# Allegro board s1d13700.brd
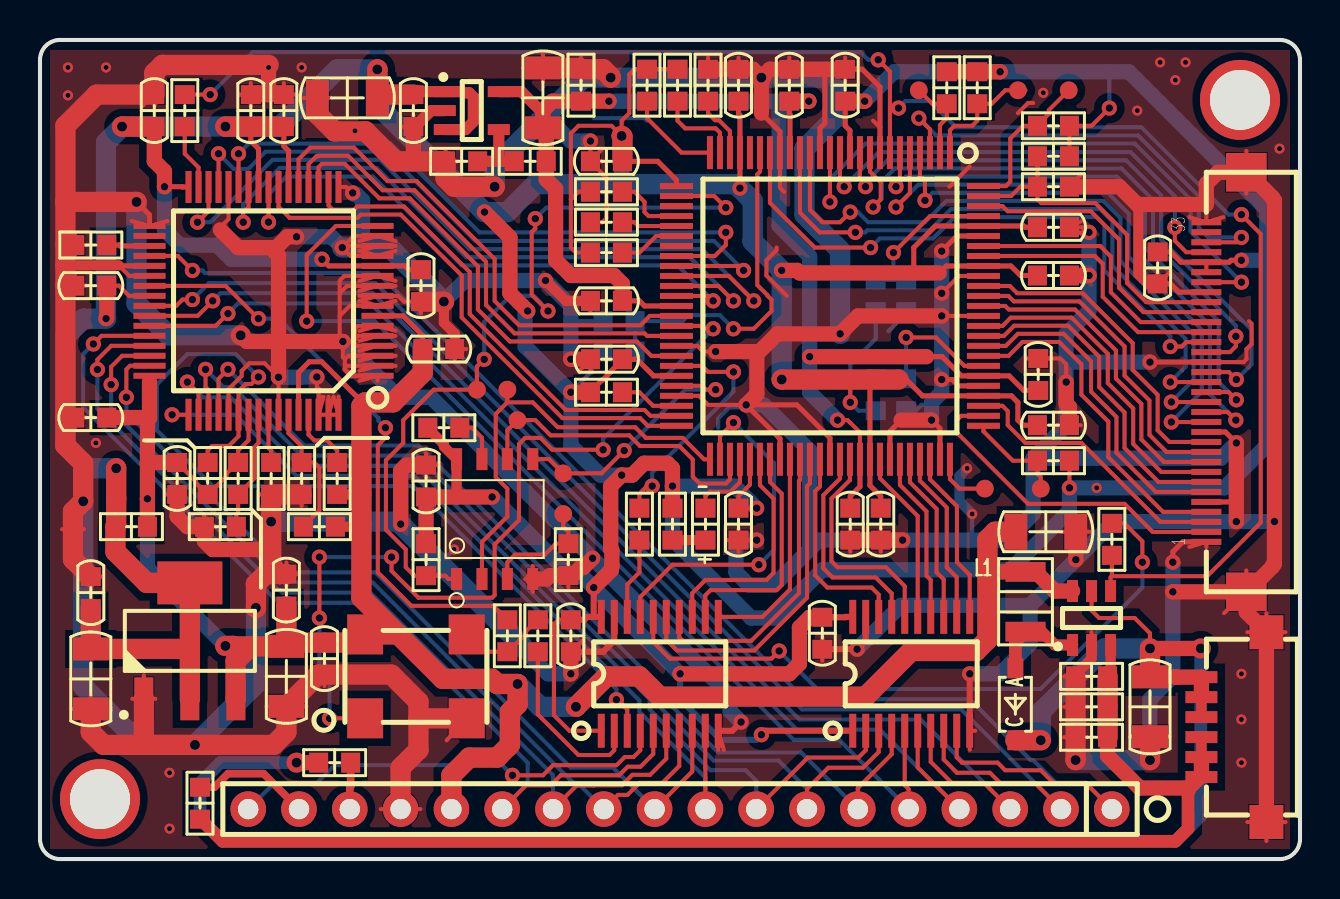
[diagram p0: board, top side]
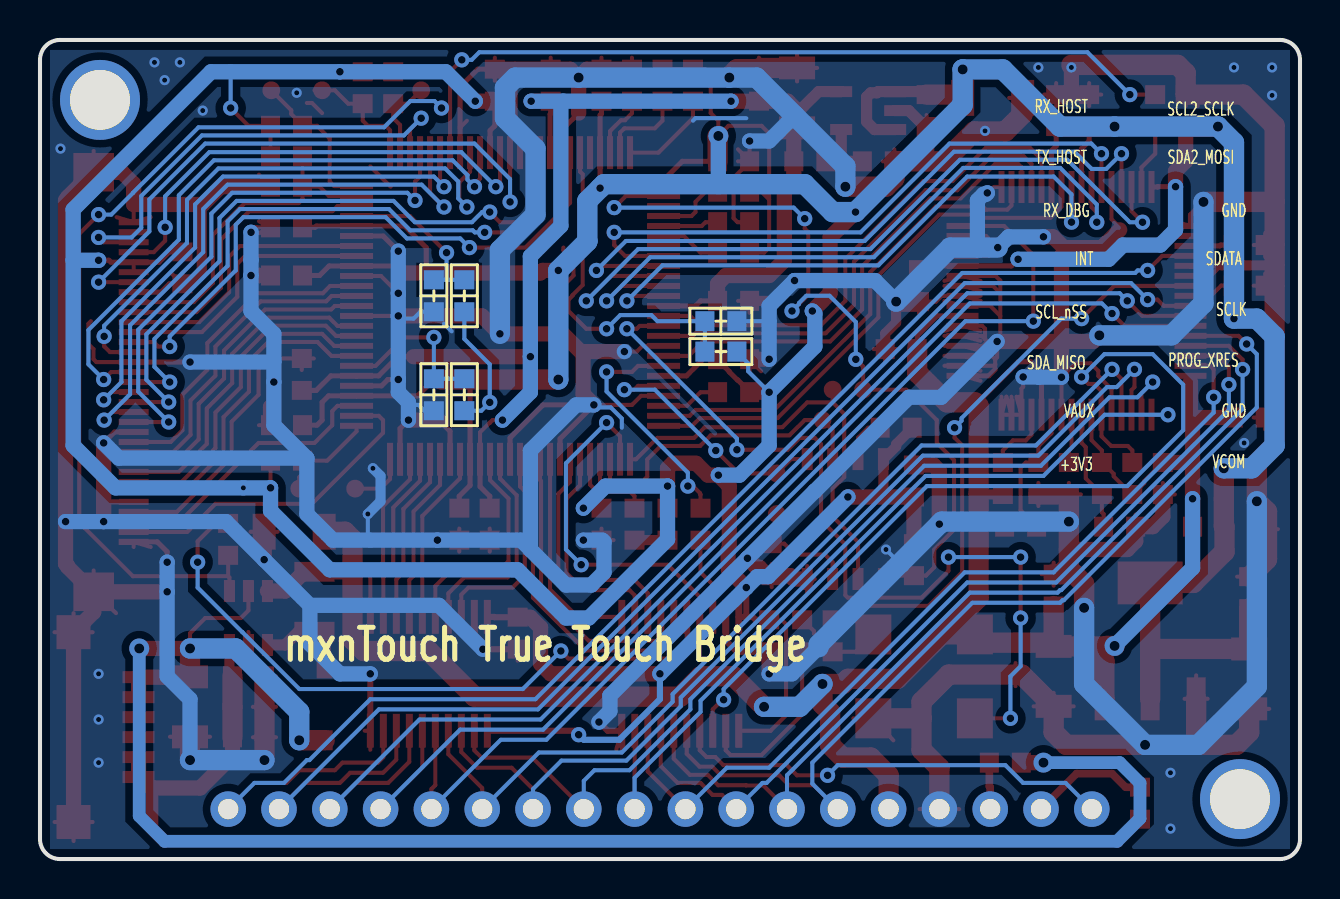
[diagram p1: board, bottom side, seen from below]

Outline 63 x 41 mm; copper layers: TOP, BOTTOM. Coordinates in mm from the lower left corner of the outline.
Outline path: 0,40 0,1 arc(0.29,0.29) 1,0 62,0 arc(62.71,0.29) 63,1 63,40 arc(62.71,40.71) 62,41 1,41 arc(0.29,40.71) 0,40

## Design rules (mm)
nets with their own width: min track width 0.203; nets +3V3

## Placement (name value [footprint] x y rotation side)
C1  0.1uF  [CC0603]  39.12 11.3 270 top
C2  0.1uF  [CC0603]  26.54 11.18 270 top
C3  10uF  [CC1206]  12.32 9.14 270 top
C4  0.1uF  [CC0603]  12.32 13.46 90 top
C5  10uF  [CC1206]  2.54 9.02 270 top
C6  0.1uF  [CC0603]  2.54 13.34 90 top
C7  0.1uF  [CC0603]  14.22 10.03 90 top
C8  10uF  [CC1206]  15.37 38.1 180 top
C9  0.1uF  [CC0603]  18.67 37.47 270 top
C10  10uF  [CC1206]  25.15 38.1 90 top
C11  0.1uF  [CR0603]  27.05 38.73 90 top
C12  0.1uF  [CC0603]  19.05 28.7 270 top
C13  0.1uF  [CC0603]  10.54 37.47 90 top
C14  0.1uF  [CC0603]  2.54 28.7 180 top
C15  0.1uF  [CC0603]  19.94 25.53 0 top
C16  0.1uF  [CC0603]  2.54 22.1 180 top
C17  0.1uF  [CC0603]  6.86 19.05 270 top
C18  0.1uF  [CC0603]  12.19 37.47 90 top
C19  0.1uF  [CC0603]  5.71 37.47 90 top
C20  0.1uF  [CC0603]  19.3 18.92 90 top
C21  0.1uF  [CC0603]  42.04 16.76 270 top
C22  0.1uF  [CC0603]  50.67 31.62 0 top
C23  0.1uF  [CC0603]  50.67 21.72 0 top
C24  0.1uF  [CC0603]  28.32 25.02 180 top
C25  0.1uF  [CC0603]  28.32 34.92 180 top
C26  0.1uF  [CC0603]  40.26 38.73 90 top
C27  0.1uF  [CC0603]  34.92 38.73 90 top
C28  0.1uF  [CC0603]  34.92 16.76 270 top
C29  0.1uF  [CC0603]  50.67 29.21 0 top
C30  0.1uF  [CC0603]  40.51 16.76 270 top
C31  0.1uF  [CC0603]  28.32 27.94 180 top
C32  0.1uF  [CC0603]  37.47 38.73 90 top
C33  0.1uF  [CC0603]  49.91 24.26 90 top
C34  0.1uF  [CC0603]  55.88 29.59 270 top
C36  4.7uF  [CC1206]  50.29 16.38 0 top
C37  4.7uF  [CC1206]  55.5 7.62 270 top
D1  LED_G  [LED0603]  33.27 16.76 90 top
D2  MBR0530T1G  [SOD123]  48.77 7.75 90 top
J1  CON18  [SIP18]  53.59 2.5 90 top
J3  TM057KDH01  [CON33]  59.82 23.88 90 top
J4  CON6  [CON6X1_P1_00]  60.07 6.6 270 top
L1  10uH  [CL1210]  49.28 12.88 270 top
NOREF  -  [unnamed]  60 38 0 top
NOREF#2  -  [#2]  542.75 -82.65 0 top
NOREF#3  -  [#2]  193.54 16.72 0 top
NOREF#4  -  [unnamed]  3 3 0 top
R1  10K  [CR0603]  8.38 19.05 90 top
R2  33  [CR0603]  29.97 16.76 90 top
R3  0  [CR0603]  4.57 16.64 180 top
R4  33  [CR0603]  24.89 11.18 270 top
R5  33  [CR0603]  23.37 11.18 90 top
R6  DNP  [CR0603]  24.51 34.92 180 top
R7  DNP  [CR0603]  21.08 34.92 180 top
R8  0  [CR0603]  9.91 19.05 90 top
R9  DNC  [CR0603]  9.02 16.64 180 top
R10  0  [CR0603]  11.56 19.05 270 top
R11  0  [CR0603]  13.08 19.05 270 top
R12  DNC  [CR0603]  13.97 16.64 0 top
R13  0  [CR0603]  14.86 19.05 90 top
R14  4.7K  [CR0603]  2.54 30.73 0 top
R15  0  [CR0603]  30.35 38.73 270 top
R16  0  [CR0603]  31.88 38.73 270 top
R17  0  [CR0603]  33.4 38.73 270 top
R18  0  [CR0603]  28.32 33.4 180 top
R19  0  [CR0603]  28.32 30.35 180 top
R20  0  [CR0603]  28.32 31.88 180 top
R21  DNC  [CR0603]  50.67 35.18 0 top
R22  10K  [CR0603]  50.67 33.66 180 top
R23  4.7K  [CR0603]  28.32 23.37 180 top
R24  4.7K  [CR0603]  41.78 23.24 270 bottom
R25  4.7K  [CR0603]  43.31 23.24 90 bottom
R26  4.7K  [CR0603]  41.78 28.19 270 bottom
R27  4.7K  [CR0603]  43.31 28.19 90 bottom
R28  4.7K  [CR0603]  50.67 36.7 180 top
R29  4.7K  [CR0603]  31.62 16.76 270 top
R30  4.7K  [CR0603]  28.96 25.4 180 bottom
R31  4.7K  [CR0603]  28.96 26.92 0 bottom
R32  4.7K  [CR0603]  45.34 38.61 270 top
R33  4.7K  [CR0603]  50.67 19.94 180 top
R34  4.7K  [CR0603]  46.86 38.61 270 top
R35  4.7K  [CR0603]  19.3 14.99 270 top
R36  4.7K  [CR0603]  20.19 21.59 0 top
R37  4.7K  [CR0603]  26.42 14.99 270 top
R38  1.1  [CR0603]  52.58 9.14 180 top
R39  1.1  [CR0603]  52.58 7.62 180 top
R40  1.1  [CR0603]  52.58 6.1 180 top
R41  DNC  [CR0603]  14.73 4.83 180 top
R42  DNC  [CR0603]  8 2.79 270 top
R43  DNC  [CR0603]  53.59 16 270 top
R45  DNC  [CR0603]  7.24 37.47 90 top
TP1  TP  [TP-035C]  47.24 18.54 0 top
TP2  TP  [TP-035C]  50.04 18.54 0 top
TP3  TP  [TP-035C]  48.9 38.48 0 top
TP4  TP  [TP-035C]  43.94 38.48 0 top
TP5  TP  [TP-035C]  23.88 21.97 0 top
TP6  TP  [TP-035C]  26.16 19.3 0 top
TP7  TP  [TP-035C]  23.37 23.5 0 top
TP8  TP  [TP-035C]  21.84 23.5 0 top
TP9  TP  [TP-035C]  26.16 17.27 0 top
TP10  TP  [TP-035C]  51.44 38.48 0 top
TP11  TP  [TP-035C]  3.81 18.03 0 top
TP12  TP  [TP-035C]  1.65 16.51 0 top
U1  SN74AC245  [TSSOP-20N]  28.06 6.42 0 top
U2  SN74AC245  [TSSOP-20N]  40.64 6.42 0 top
U3  LM1117-3.3V  [SOT223]  7.49 10.92 90 top
U4  SG8002  [SG8002JF]  18.8 9.14 0 top
U5  TLV70012  [SOT23-5]  21.59 37.47 270 top
U6  S1D13700  [TQFP-64N]  11.18 27.94 180 top
U7  XC3S50A-4VQG100C  [TQFP-100N]  39.5 27.69 270 top
U8  SST25VF010  [SOIC-8N]  20.83 14.02 90 top
U9  SP1072  [SOT23-6N]  52.58 12.06 0 top

## Library data of the parts
C1-C34 C36 C37 = CAP
D1 = LED
D2 = MBR0530T1G
J1 = CON18
J3 = TM057KDH01
J4 = CON6
L1 = INDUCTOR
R1-R43 R45 = RES1
TP1-TP12 = TP
U1 U2 = SN74AC245
U3 = LM1117-3.3V
U4 = SG8002
U5 = TLV70012
U6 = S1D13700
U7 = XC3S50A-4VQG100C
U8 = SST25VF010
U9 = SP1072

## Footprints (pads in the part's own frame, mm; a bottom-side part is the same pattern mirrored in y, then rotated)
CC0603
  rect 0.95x1 smd: 1(-0.8,0) 2(0.8,0)
CC1206
  rect 1.15x1.8 smd: 1(-1.5,0) 2(1.5,0)
CL1210
  rect 0.991x2.007 smd: 1(-1.499,0) 2(1.499,0)
CON6X1_P1_00
  rect 0.6x1.6 smd: 1(-2.5,-2) 2(-1.5,-2) 3(-0.5,-2) 4(0.5,-2) 5(1.5,-2) 6(2.5,-2)
  rect 1.7x1.7 smd: 7(-4.75,1.25) 8(4.75,1.25)
CON33
  rect 0.305x1.499 smd: 1(-8,1.5) 2(-7.5,1.5) 3(-7,1.5) 4(-6.5,1.5) 5(-6,1.5) 6(-5.5,1.5) 7(-5,1.5) 8(-4.5,1.5) 9(-4,1.5) 10(-3.5,1.5) 11(-3,1.5) 12(-2.5,1.5) 13(-2,1.5) 14(-1.5,1.5) 15(-1,1.5) 16(-0.5,1.5) 17(0,1.5) 18(0.5,1.5) 19(1,1.5) 20(1.5,1.5) 21(2,1.5) 22(2.5,1.5) 23(3,1.5) 24(3.5,1.5) 25(4,1.5) 26(4.5,1.5) 27(5,1.5) 28(5.5,1.5) 29(6,1.5) 30(6.5,1.5) 31(7,1.5) 32(7.5,1.5) 33(8,1.5)
  rect 1.93x2.032 smd: 34(-10.5,-0.5) 35(10.5,-0.5)
CR0603
  rect 0.95x1 smd: 1(-0.8,0) 2(0.8,0)
LED0603
  rect 0.95x1 smd: 1(-0.8,0) 2(0.8,0)
SG8002JF
  rect 1.8x2 smd: 1(-2.54,-2.1) 2(2.54,-2.1) 3(2.54,2.1) 4(-2.54,2.1)
SIP18
  round 1.778 hole 1.016: 1(0,0) 2(0,2.54) 3(0,5.08) 4(0,7.62) 5(0,10.16) 6(0,12.7) 7(0,15.24) 8(0,17.78) 9(0,20.32) 10(0,22.86) 11(0,25.4) 12(0,27.94) 13(0,30.48) 14(0,33.02) 15(0,35.56) 16(0,38.1) 17(0,40.64) 18(0,43.18)
SOD123
  rect 1x0.8 smd: 1(1.8,0) 2(-1.8,0)
SOIC-8N
  rect 1.1x0.55 smd: 1(0,0) 2(0,-1.27) 3(0,-2.54) 4(0,-3.81) 5(6,-3.81) 6(6,-2.54) 7(6,-1.27) 8(6,0)
SOT23-5
  rect 0.55x1.1 smd: 1(-0.95,-1.35) 2(0,-1.35) 3(0.95,-1.35) 4(0.95,1.35) 5(-0.95,1.35)
SOT23-6N
  rect 0.55x1.1 smd: 1(-0.95,-1.35) 2(0,-1.35) 3(0.95,-1.35) 4(0.95,1.35) 5(0,1.35) 6(-0.95,1.35)
SOT223
  rect 2.149x0.95 smd: 1(-2.901,2.301) 2(-2.901,0) 3(-2.901,-2.301)
  rect 2.149x3.251 smd: 4(2.901,0)
TP-035C
  round 0.889 smd: 1(0,0)
TQFP-64N
  rect 1.6x0.3 smd: 1(-5.7,3.75) 2(-5.7,3.25) 3(-5.7,2.75) 4(-5.7,2.25) 5(-5.7,1.75) 6(-5.7,1.25) 7(-5.7,0.75) 8(-5.7,0.25) 9(-5.7,-0.25) 10(-5.7,-0.75) 11(-5.7,-1.25) 12(-5.7,-1.75) 13(-5.7,-2.25) 14(-5.7,-2.75) 15(-5.7,-3.25) 16(-5.7,-3.75) 33(5.7,-3.75) 34(5.7,-3.25) 35(5.7,-2.75) 36(5.7,-2.25) 37(5.7,-1.75) 38(5.7,-1.25) 39(5.7,-0.75) 40(5.7,-0.25) 41(5.7,0.25) 42(5.7,0.75) 43(5.7,1.25) 44(5.7,1.75) 45(5.7,2.25) 46(5.7,2.75) 47(5.7,3.25) 48(5.7,3.75)
  rect 0.3x1.6 smd: 17(-3.75,-5.7) 18(-3.25,-5.7) 19(-2.75,-5.7) 20(-2.25,-5.7) 21(-1.75,-5.7) 22(-1.25,-5.7) 23(-0.75,-5.7) 24(-0.25,-5.7) 25(0.25,-5.7) 26(0.75,-5.7) 27(1.25,-5.7) 28(1.75,-5.7) 29(2.25,-5.7) 30(2.75,-5.7) 31(3.25,-5.7) 32(3.75,-5.7) 49(3.75,5.7) 50(3.25,5.7) 51(2.75,5.7) 52(2.25,5.7) 53(1.75,5.7) 54(1.25,5.7) 55(0.75,5.7) 56(0.25,5.7) 57(-0.25,5.7) 58(-0.75,5.7) 59(-1.25,5.7) 60(-1.75,5.7) 61(-2.25,5.7) 62(-2.75,5.7) 63(-3.25,5.7) 64(-3.75,5.7)
TQFP-100N
  rect 1.65x0.3 smd: 1(-7.675,6) 2(-7.675,5.5) 3(-7.675,5) 4(-7.675,4.5) 5(-7.675,4) 6(-7.675,3.5) 7(-7.675,3) 8(-7.675,2.5) 9(-7.675,2) 10(-7.675,1.5) 11(-7.675,1) 12(-7.675,0.5) 13(-7.675,0) 14(-7.675,-0.5) 15(-7.675,-1) 16(-7.675,-1.5) 17(-7.675,-2) 18(-7.675,-2.5) 19(-7.675,-3) 20(-7.675,-3.5) 21(-7.675,-4) 22(-7.675,-4.5) 23(-7.675,-5) 24(-7.675,-5.5) 25(-7.675,-6) 51(7.675,-6) 52(7.675,-5.5) 53(7.675,-5) 54(7.675,-4.5) 55(7.675,-4) 56(7.675,-3.5) 57(7.675,-3) 58(7.675,-2.5) 59(7.675,-2) 60(7.675,-1.5) 61(7.675,-1) 62(7.675,-0.5) 63(7.675,0) 64(7.675,0.5) 65(7.675,1) 66(7.675,1.5) 67(7.675,2) 68(7.675,2.5) 69(7.675,3) 70(7.675,3.5) 71(7.675,4) 72(7.675,4.5) 73(7.675,5) 74(7.675,5.5) 75(7.675,6)
  rect 0.3x1.65 smd: 26(-6,-7.675) 27(-5.5,-7.675) 28(-5,-7.675) 29(-4.5,-7.675) 30(-4,-7.675) 31(-3.5,-7.675) 32(-3,-7.675) 33(-2.5,-7.675) 34(-2,-7.675) 35(-1.5,-7.675) 36(-1,-7.675) 37(-0.5,-7.675) 38(0,-7.675) 39(0.5,-7.675) 40(1,-7.675) 41(1.5,-7.675) 42(2,-7.675) 43(2.5,-7.675) 44(3,-7.675) 45(3.5,-7.675) 46(4,-7.675) 47(4.5,-7.675) 48(5,-7.675) 49(5.5,-7.675) 50(6,-7.675) 76(6,7.675) 77(5.5,7.675) 78(5,7.675) 79(4.5,7.675) 80(4,7.675) 81(3.5,7.675) 82(3,7.675) 83(2.5,7.675) 84(2,7.675) 85(1.5,7.675) 86(1,7.675) 87(0.5,7.675) 88(0,7.675) 89(-0.5,7.675) 90(-1,7.675) 91(-1.5,7.675) 92(-2,7.675) 93(-2.5,7.675) 94(-3,7.675) 95(-3.5,7.675) 96(-4,7.675) 97(-4.5,7.675) 98(-5,7.675) 99(-5.5,7.675) 100(-6,7.675)
TSSOP-20N
  rect 0.35x1.7 smd: 1(0,0) 2(0.65,0) 3(1.3,0) 4(1.95,0) 5(2.6,0) 6(3.25,0) 7(3.9,0) 8(4.55,0) 9(5.2,0) 10(5.85,0) 11(5.85,5.7) 12(5.2,5.7) 13(4.55,5.7) 14(3.9,5.7) 15(3.25,5.7) 16(2.6,5.7) 17(1.95,5.7) 18(1.3,5.7) 19(0.65,5.7) 20(0,5.7)
unnamed
  round 4 hole 3: (0,0)

## Nets
+1V2: C10.1 C11.1 C30.1 C31.1 C32.1 C33.1 R6.1 U5.5(OUT) U7.17(VCCINT#17) U7.38(VCCINT#38) U7.66(VCCINT#66) U7.81(VCCINT#81)
+3V3: C1.1 C2.1 C5.1 C6.1 C8.1 C9.1 C12.1 C13.1 C14.1 C18.1 C19.1 C20.1 C21.1 C22.1 C23.1 C24.1 C25.1 C26.1 C27.1 C28.1 C29.1 C34.1 J3.28(VCC1) J3.29(VCC2) R3.2 R15.1 R16.1 R18.2 R19.2 R21.2 R23.2 R24.2 R26.2 R28.1 R29.1 R30.2 R32.1 R33.1 R34.1 R35.1 R36.1 TP11.1(TP) U1.1(DIR) U1.20(VCC) U2.1(DIR) U2.20(VCC) U3.2(VOUT1) U3.4(VOUT2) U5.1(IN) U5.3(EN) U6.12(COREVDD1) U6.22(NIOVDD1) U6.25(COREVDD2) U6.32(NIOVDD2) U6.40(COREVDD3) U7.11(VCCO_3) U7.22(VCCAUX#22) U7.26(VCCO_2#26) U7.45(VCCO_2#45) U7.55(VCCAUX#55) U7.67(VCCO_1) U7.79(VCCO_0#79) U7.92(VCCAUX#92) U7.96(VCCO_0#96) U8.8(VDD)
+5V0: C3.1 C4.1 C7.2 C15.1 C16.1 C17.1 C36.1 J1.14 L1.1 R1.1 R3.1 R8.2 R12.2 R13.1 U3.3(VIN) U4.4(VCC) U6.7(HIOVDD1) U6.48(HIOVDD2) U6.55(HIOVDD3) U6.60(CNF4) U9.6(IN)
GND: C1.2 C2.2 C3.2 C4.2 C5.2 C6.2 C7.1 C8.2 C9.2 C10.2 C11.2 C12.2 C13.2 C14.2 C15.2 C16.2 C17.2 C18.2 C19.2 C20.2 C21.2 C22.2 C23.2 C24.2 C25.2 C26.2 C27.2 C28.2 C29.2 C30.2 C31.2 C32.2 C33.2 C34.2 C36.2 C37.2 J1.15 J3.1(GND1) J3.5(GND2) J3.12(GND3) J3.19(GND4) J3.26(GND5) J3.33(GND6) J3.34(GND7) J3.35(GND8) J4.7 J4.8 R7.2 R9.2 R10.2 R11.2 R14.1 R17.1 R20.2 R22.1 R25.1 R27.1 R31.1 R37.2 R38.2 R39.2 R40.2 TP12.1(TP) U1.10(GND) U1.19(#OE) U2.10(GND) U2.19(#OE) U3.1(GND) U4.2(GND) U5.2(GND) U6.1(VSS1) U6.2(A12) U6.3(A11) U6.4(A10) U6.5(A9) U6.6(A8) U6.8(A7) U6.9(A6) U6.10(A5) U6.11(A4) U6.13(A3) U6.14(A2) U6.15(A1) U6.17(VSS2) U6.28(VSS3) U6.33(VSS4) U6.37(SCANEN) U6.38(TESTEN) U6.53(VSS5) U6.58(CNF2) U6.62(A15) U6.63(A14) U6.64(A13) U7.8(GND#8) U7.14(GND#14) U7.18(GND#18) U7.42(GND#42) U7.47(GND#47) U7.58(GND#58) U7.63(GND#63) U7.69(GND#69) U7.74(GND#74) U7.80(GND#80) U7.87(GND#87) U7.91(GND#91) U7.95(GND#95) U8.4(VSS) U9.2(GND)
#CS: J1.4 U2.6(A5) U6.43(#CS)
#FCS: U2.14(B5) U7.70(IO_L05P_1)
#FRD: U2.12(B7) U7.72(IO_L06P_1)
#FWAIT: U1.17(B2) U7.52(IO_L12P_2/D1)
#FWR: U2.13(B6) U7.71(IO_L05N_1)
#FXRES: U2.11(B8) U7.73(IO_L06N_1)
#RD: J1.2 U2.8(A7) U6.41(#RD)
#SPI_CS: R35.2 TP8.1(TP) U7.27(IO_L02N_2/CSO_B) U8.1(#CE)
#SPI_WP: R37.1 TP9.1(TP) U8.3(#WP)
#WAIT: R1.2 U1.3(A2) U6.54(#WAIT)
#WR: J1.3 U2.7(A6) U6.42(#WR)
#XRES: J1.1 U2.9(A8) U6.36(#RESET)
A0: J1.5 U2.5(A4) U6.16(A0)
B0: J3.20(B0) U7.9(IO_L03P_3/LHCLK0)
B1: J3.21(B1) U7.19(IO_L06P_3)
B2: J3.22(B2) U7.93(IO_L05P_0)
B3: J3.23(B3) U7.94(IO_L05N_0)
B4: J3.24(B4) U7.98(IO_L06P_0/VREF_0)
B5: J3.25(B5) R21.1 R22.2 U7.99(IO_L06N_0/PUDC_B)
CLK: R5.2 U6.39(CLKI)
COLOR_S0: R24.1 R25.2 U7.82(IP_0/VREF_0)
COLOR_S1: R26.1 R27.2 U7.97(IP_0)
COLOR_S2: R30.1 R31.2 U7.20(IO_L06N_3)
COLOR_S3: U7.32(IO_L05P_2)
COLOR_S4: U7.21(IP_3)
COLOR_S5: U7.28(IO_L03P_2/RDWR_B)
D0: J1.6 U2.4(A3) U6.52(D0)
D1: J1.7 U2.3(A2) U6.51(D1)
D2: J1.8 U2.2(A1) U6.50(D2)
D3: J1.9 U1.9(A8) U6.49(D3)
D4: J1.10 U1.8(A7) U6.47(D4)
D5: J1.11 U1.7(A6) U6.46(D5)
D6: J1.12 U1.6(A5) U6.45(D6)
D7: J1.13 U1.5(A4) U6.44(D7)
DCLK: J3.2(DOTCLK) U7.77(IO_L01P_0/VREF_0)
DONE: D1.2(K) U7.54(DONE)
ENABLE: J3.27(ENABLE) U7.13(IO_L04N_3/IRDY2/LHCLK3)
FA0: U2.15(B4) U7.68(IP_1/VREF_1)
FCLK: R2.2 U7.44(IO_L09N_2/GCLK1)
FD0: U2.16(B3) U7.65(IO_L04N_1/RHCLK7)
FD1: U2.17(B2) U7.64(IO_L04P_1/IRDY1/RHCLK6)
FD2: U2.18(B1) U7.62(IO_L03N_1/TRDY1/RHCLK3)
FD3: U1.11(B8) U7.59(IO_L02P_1/RHCLK0)
FD4: U1.12(B7) U7.57(IO_L01N_1)
FD5: U1.13(B6) U7.56(IO_L01P_1)
FD6: U1.14(B5) U7.60(IO_L02N_1/RHCLK1)
FD7: U1.15(B4) U7.61(IO_L03P_1/RHCLK2)
FPDAT0: U6.21(FPDAT0) U7.39(IP_2/VREF_2)
FPDAT1: U6.20(FPDAT1) U7.41(IO_L08N_2/GCLK15)
FPDAT2: U6.19(FPDAT2) U7.43(IO_L09P_2/GCLK0)
FPDAT3: U6.18(FPDAT3) U7.49(IO_L10N_2/D3)
FPFRAME: U6.30(FPFRAME) U7.35(IO_L06N_2/D6)
FPLINE: U6.26(FPLINE) U7.36(IO_L07P_2/D5)
FPSHIFT: U6.23(FPSHIFT) U7.50(IO_L11P_2/D2)
G0: J3.13(G0) U7.4(IO_L01N_3)
G1: J3.14(G1) U7.5(IO_L02P_3)
G2: J3.15(G2) U7.15(IO_L05P_3/TRDY2/LHCLK6)
G3: J3.16(G3) U7.6(IO_L02N_3)
G4: J3.17(G4) U7.16(IO_L05N_3/LHCLK7)
G5: J3.18(G5) U7.10(IO_L03N_3/LHCLK1)
HSYNC: J3.3(HSYNC) U7.78(IO_L01N_0)
LEDA: C37.1 D2.2(CATHODE) J4.1 J4.2 J4.3 R41.2 U9.5(OV)
LEDK: J4.4 J4.5 J4.6 R38.1 R39.1 R40.1 R42.2 U9.3(FB)
M0: R15.2 U7.25(IO_L01N_2/M0)
M1: R17.2 U7.23(IO_L01P_2/M1)
M2: R16.2 U7.24(IO_L02P_2/M2)
MOD: U6.27(MOD) U7.33(IO_L06P_2)
PROG_B: R28.2 TP10.1(TP) U7.100(PROG_B)
R0: J3.6(R0) U7.84(IO_L02N_0/GCLK5)
R1: J3.7(R1) U7.85(IO_L03P_0/GCLK6)
R2: J3.8(R2) U7.86(IO_L03N_0/GCLK7)
R3: J3.9(R3) U7.88(IO_L04P_0/GCLK8)
R4: J3.10(R4) U7.89(IO_L04N_0/GCLK9)
R5: J3.11(R5) U7.90(IO_0/GCLK11)
RL: J3.30(R/L) U7.12(IO_L04P_3/LHCLK2)
SLP: J1.18 U1.4(A3)
SPI_CLK: TP5.1(TP) U7.53(IO_L12N_2/CCLK) U8.6(SCK)
SPI_MISO: TP7.1(TP) U7.51(IO_L11N_2/D0/DIN/MISO) U8.2(SO)
SPI_MOSI: TP6.1(TP) U7.46(IO_2/MOSI/CSI_B) U8.5(SI)
STANDBY: U4.1(OE/#ST) U7.40(IO_L08P_2/GCLK14)
TCK: R33.2 TP2.1(TP) U7.76(TCK)
TDI: R32.2 TP4.1(TP) U7.2(TDI)
TDO: TP1.1(TP) U7.75(TDO)
TMS: R34.2 TP3.1(TP) U7.1(TMS)
UD: J3.31(U/D) U7.3(IO_L01P_3)
VS0: R19.1 U7.31(IO_L04N_2/VS0)
VS1: R20.1 U7.30(IO_L03N_2/VS1)
VS2: R18.1 U7.29(IO_L04P_2/VS2)
VSYNC: J3.4(VSYNC) U7.83(IO_L02P_0/GCLK4)
XECL: U6.24(XECL) U7.37(IO_L07N_2/D4)
YDIS: R43.2 R45.2 U7.7(IP_3/VREF_3) U9.4(EN)
YSCL: U6.29(YSCL) U7.34(IO_L05N_2/D7)
N1268731: R45.1 U6.31(YDIS)
N1269622: R13.2 U6.61(#AS)
N1269731: R14.2 U6.35(XCG1)
N1279949: R6.2 R7.1 U5.4(NC)
N1292260: J1.16 R41.1
N1295201: R4.1 R5.1 U4.3(OUT)
N1295205: R4.2 U1.2(A1)
N1302115: R11.1 R12.1 U6.59(CNF3)
N1302518: R10.1 U6.57(CNF1)
N1302632: R8.1 R9.1 U6.56(CNF0)
N1385205: R23.1 U7.48(IO_L10P_2/INIT_B)
N1393291: D1.1(A) R29.2
N1408610: R36.2 U8.7(#HOLD)
N1457773: D2.1(ANODE) L1.2 U9.1(SW)
N1465328: J1.17 R42.1
N1502699: R2.1 U1.18(B1)
N1509290: R43.1 U1.16(B3)

Pads without a net: J3 32; U6 34

## Via types
v1: diameter 0.762, hole 0.381, TOP to BOTTOM, 136 vias
v2: diameter 1, hole 0.5, TOP to BOTTOM, 25 vias
v3: diameter 0.508, hole 0.254, TOP to BOTTOM, 22 vias

## Routing (per net, layer and track width the routed paths; a pad name or vN(x,y) marks a point on that pad's centre or on a via; arc(x,y) is an arc through that point)
+1V2: length 69.7
  TOP w0.203: v1(39.88,21.97) 40.37,21.97 40.5,21.84 40.51,21.84 41,21.36 U7.66
  TOP w0.254: C30.1 40.51,18.16 41,18.64 U7.66 ; C33.1 49.19,23.46 48.46,24.19 U7.81 46.07,24.19 45.11,25.15 44.32,25.15 ; U7.38 30.23,27.69 29.97,27.94 C31.1 ; C32.1 37.47,37.31 37.5,37.28 U7.17
  TOP w0.559: U5.5 24.07,38.42 25.15,37.34
  TOP w0.762: C32.1 v1(38.44,37.93) ; v1(38.48,25.15) 44.32,25.15 ; v1(28.45,37.93) C11.1 25.62,37.93 25.15,37.47 C10.1 25.31,36.43 R6.1 25.31,34.02 25.78,33.55 25.78,29.97 26.54,29.21 28.7,29.21 29.12,28.79 C31.1
  BOTTOM w0.762: v1(39.88,21.97) 38.48,23.37 v1(38.48,25.15) 38.48,30.17 36.96,31.69 36.96,37.81 36.83,37.93 ; 36.83,37.93 v1(28.45,37.93) ; 36.83,37.93 v1(38.44,37.93)
+3V3: length 405.7
  TOP w0.203: 26.54,33.02 26.54,36.32 26.92,36.7 28.57,36.7 v2(29.08,36.2) 29.08,36.96 29.46,37.34 29.46,39.27 29.73,39.54 R15.1 R16.1 ; 26.54,33.02 26.54,30.61 26.8,30.35 R19.2 ; 26.54,33.02 26.92,33.4 R18.2 ; U1.1 26.47,6.42 25.7,7.2 25.7,11.76 25.92,11.98 C2.1 ; U6.40 4.45,28.19 3.94,28.7 C14.1 ; J3.28 J3.29 ; U7.55 35.5,18.74 34.92,18.17 C28.1 v1(35.83,17.56) ; R21.2 R28.1 52.58,36.7 v1(53.47,37.59) ; R33.1 v1(51.47,18.58) ; v1(40.51,22.86) 40.51,24
  TOP w0.254: U7.26 31.82,33.99 30.89,34.92 C25.1 ; 41.53,24 41.5,23.97 U7.67 41.5,18.7 42.04,18.16 C21.1 ; 44.96,29.34 45.31,29.69 U7.92 48.55,29.69 49.02,29.21 C29.1 ; U6.22 12.43,35.45 12.19,35.69 C18.1 ; C26.1 40.26,36.7 40.5,36.47 U7.11 ; C27.1 34.92,37.31 35,37.24 U7.22 v1(35,33.58) ; 42.93,24 43.31,24 44.12,23.19 U7.79 48.57,23.19 48.9,22.86 48.9,21.97 49.15,21.72 C23.1 ; C34.1 56.53,30.39 57.05,29.88 J3.29 59.45,29.88 59.55,29.97 v1(60.07,29.97) ; v1(14.1,30.02) 14.43,29.69 U6.12 18.24,29.69 18.42,29.5 C12.1 ; 43.69,29.34 43.69,30.61 44.77,31.69 U7.96 49.18,31.69 49.25,31.62 C22.1 ; C13.1 10.54,35.94 10.93,35.56 U6.25 ; v1(6.22,33.66) 7.11,33.66 7.12,33.64 U6.32 ; R23.2 27.52,23.39 28.1,23.98 28.13,23.98 28.54,24.39 28.54,24.41 29.12,24.99 C24.1 29.84,25.02 30.68,24.19 U7.45
  TOP w0.305: 27.69,12.12 27.37,12.12 27.22,11.98 C2.1 ; 27.69,12.12 U1.20 ; 27.69,12.12 v1(27.69,13.59) ; U2.20 40.28,12.12 40.27,12.1 C1.1 ; v1(36.07,6.22) 36.27,6.42 U2.1
  TOP w0.508: 20.83,18.12 U8.8 20.19,20.65 20.19,20.76 19.39,21.57 R36.1
  TOP w0.559: U5.3 21.27,36.51 21.67,36.91 21.67,38.15 21.46,38.35 21.16,38.35 21.09,38.42 U5.1 18.82,38.42 C9.1
  TOP w0.762: v1(32,9.27) 37.47,9.27 37.97,9.78 37.97,11.59 38.49,12.1 C1.1 ; R29.1 v1(31.62,18.67) 31.62,19.56 31.37,19.81 30.2,19.81 29.6,19.22 v1(29.08,19.22) 28.54,18.67 28.54,15.51 28.59,15.46 28.59,14.66 28.57,14.64 28.57,14.48 v1(27.69,13.59) ; v1(24.38,27.43) 23.5,28.32 23.5,31.11 v1(22.23,32.38) ; R35.1 C20.1 v1(22.61,18.12) ; R23.2 v1(26.54,23.37) ; C14.1 3.34,27.09 v1(3.3,27.05) ; v1(48.01,39.41) R34.1 R32.1 ; 44.96,29.34 37.99,29.34 37.86,29.46 v1(37.08,29.46) ; v1(41.24,37.93) C26.1 ; C19.1 5.71,34.94 6.22,34.43 v1(6.22,33.66)
  TOP w1.016: v2(3.81,19.56) TP11.1 3.81,16.68 R3.2 3.77,15.38 5.33,13.82 U3.4 7.49,10.54 ; 7.49,10.54 7.47,10.52 C5.1 C6.1 ; 7.49,10.54 U3.2 ; v2(37.08,24) 42.93,24 ; C18.1 C13.1 v2(9.27,36.66) ; C19.1 v2(4.1,36.66) ; C25.1 29.12,36.16 v2(29.08,36.2) ; C9.1 17.03,38.27 C8.1 v2(16.87,39.53)
  BOTTOM w0.203: R26.2 41.78,26.04 40.51,24.77 v1(40.51,22.86) 40.93,22.44 R24.2 ; R30.2 28.16,25.38 27.59,24.81 27.59,24.42 v1(26.54,23.37) ; v1(53.47,37.59) 53.47,39.41
  BOTTOM w0.305: v1(36.07,6.22) 35.81,5.97 34.04,5.97 32,8 v1(32,9.27)
  BOTTOM w0.762: v1(22.61,18.12) 26.59,14.14 27.14,14.14 v1(27.69,13.59) v1(32,9.27) ; v1(24.38,27.43) 24.26,27.3 24.26,25.65 v1(26.54,23.37) 26.54,20.7 28.03,19.22 v1(29.08,19.22) ; v1(6.22,33.66) 6.22,31.5 6.99,30.73 8.85,30.73 9.56,30.02 v1(14.1,30.02) ; v1(41.24,37.93) 42.71,39.41 v1(48.01,39.41) 54.44,39.41 61.34,32.51 61.34,29.97 ; v1(60.07,29.97) 61.34,29.97 ; 61.34,29.97 61.34,20.7 59.22,18.58 v3(52.83,18.58) v1(51.47,18.58) 51.47,17.44 48.51,14.48 39.12,14.48 36.7,12.06 35.56,12.06 31.62,16 v1(31.62,18.67) 34.73,18.67 v1(35.83,17.56) ; v2(29.08,36.2) 29.08,33.78
  BOTTOM w1.016: v2(37.08,24) v1(37.08,29.46) 35.64,30.91 35.64,30.95 35.63,30.95 35.63,32.95 v1(35,33.58) 34.8,33.78 24.77,33.78 23.37,32.38 v1(22.23,32.38) 16.87,37.74 v2(16.87,39.53) 14.86,39.53 12,36.66 v2(9.27,36.66) v2(4.1,36.66) 3.3,35.86 v1(3.3,27.05) 2.16,27.05 1.27,26.16 1.27,20.7 2.41,19.56 v2(3.81,19.56)
+5V0: length 123.6
  TOP w0.203: 5.48,23.89 U6.48 ; C17.1 7.79,18.92 7.79,18.81 8.36,18.25 R1.1 8.41,18.25 9.32,19.16 9.32,19.29 9.88,19.85 R8.2 9.91,20.45 10.43,20.97 U6.55
  TOP w0.254: U6.60 12.93,24.36 13.46,24.89 14.09,24.89 16.12,22.86 16.26,22.86 ; U6.7 18.15,27.19 19.14,26.2 C15.1
  TOP w0.508: R13.1 16.03,18.25 16.07,18.29 ; 16.07,16.76 15.94,16.64 R12.2
  TOP w0.762: 5.48,22.1 5.37,21.99 5.37,19.81 ; 5.48,22.1 C16.1 ; 5.48,22.1 5.48,23.89 ; U9.6 50.75,13.42 49.78,14.38 L1.1 47.37,14.38 ; 5.37,19.81 5.41,19.85 C17.1 ; 5.37,19.81 v1(5.37,18.03) R3.1
  TOP w1.016: C36.1 47.75,16.38 47.37,16 47.37,10.98 46.81,10.41 43.56,10.41 41.27,8.13 30.99,8.13 29.97,9.14 28.32,9.14 v2(26.8,7.62) ; U3.3 9.78,8.04 9.78,9.91 10.52,10.64 ; 17.91,11.24 20.13,9.02 22.6,9.02 22.86,8.76 v2(23.88,8.76) 23.88,7.74 23.5,7.36 23.5,5.71 22.86,5.08 21.46,5.08 20.57,4.19 J1.14 ; 17.91,11.24 16.07,13.08 16.07,22.67 16.26,22.86 17.65,22.86 19.14,24.35 C15.1 ; 17.91,11.24 U4.4 15.85,10.83 C7.2 12.51,10.83 C3.1 ; C3.1 10.52,10.64 ; C3.1 C4.1 ; 10.52,10.64 9.68,10.64 9.65,10.67 v2(9.27,10.67)
  BOTTOM w0.762: v1(5.37,18.03) 5.37,14.57 v2(9.27,10.67)
  BOTTOM w1.016: v2(23.88,8.76) 25.02,7.62 v2(26.8,7.62)
GND: length 767.2
  TOP w0.203: 15.75,26.02 15.92,26.19 U6.5 ; 15.75,26.02 15.75,26.54 15.89,26.69 U6.6 ; 15.75,26.02 15.64,25.91 ; C6.2 3.14,14.14 ; C6.2 2.54,13.56 ; C6.2 2.54,14.71 ; 22.34,7.04 U4.2 20.33,5.94 ; 39.12,9.93 C1.2 39.12,11.08 ; 20.74,24.93 C15.2 ; C15.2 20.16,25.53 ; C15.2 21.32,25.53 ; 52.35,7.62 R39.2 51.2,7.62 ; v1(52.45,31.37) 52.2,31.62 C22.2 ; U6.62 13.93,23.55 13.84,23.63 v1(13.84,24.13) ; U6.62 14.05,23.14 ; U6.62 14.18,23.14 ; U6.62 U6.63 ; 34.32,15.96 C28.2 ; C28.2 34.92,16.54 ; C28.2 34.92,15.39 ; C28.2 v1(35.83,15.96) ; U6.4 15.86,25.69 15.64,25.91 ; U6.4 17.78,25.69 ; U6.4 15.97,25.44 ; 15.97,30.44 U6.14 ; U6.14 17.78,30.69 ; U6.14 15.2,30.69 ; 42.04,15.39 C21.2 42.04,16.54 ; 8.22,17.24 R9.2 8.79,16.64 ; 34.92,38.96 C27.2 34.92,40.11 ; U3.1 5.77,8.02 ; U3.1 4.62,8.02 ; U3.1 5.19,9.2 ; C18.2 12.19,38.84 ; C18.2 12.79,38.27 ; C18.2 12.19,37.69 ; C25.2 27.52,34.9 28.32,34.1 28.32,32.08 28.12,31.88 R20.2 ; C25.2 28.1,34.92 ; C25.2 v1(27.52,35.94) ; C25.2 28.1,35.53 ; 54.5,6.12 C37.2 ; C37.2 56.5,6.12 ; C37.2 55.5,6.8 ; 15.97,28.94 U6.11 ; U6.11 17.78,28.94 ; U6.11 15.22,29.19 14.99,28.96 14.99,28.32 ; 1.27,28.7 C14.2 ; C14.2 2.32,28.7 ; C14.2 1.74,29.3 ; J3.33 59.17,32.13 ; J3.33 57.47,32.13 ; J3.33 58.32,32.77 ; 14.99,27.19 14.99,26.07 v1(15.14,25.91) ; 14.99,27.19 15.49,27.69 U6.8 ; 14.99,27.19 14.99,28.32 ; 52.05,34.26 R22.1 52.05,33.96 ; 49.91,24.48 C33.2 ; C33.2 49.31,25.06 ; C33.2 51.02,25.06 51.31,24.77 v1(51.31,23.88) ; 13.87,37.97 C8.2 ; C8.2 14.54,38.1 ; C8.2 13.87,39.1 ; C8.2 13.19,38.1 ; U6.8 17.78,27.94 ; U6.8 15.97,27.94 ; U6.64 14.93,23.14 ; U6.64 U6.63 ; U6.64 14.67,23.14 ; U6.6 15.97,26.44 ; U6.6 17.78,26.44 ; U6.3 17.78,25.19 ; U6.3 15.97,24.94 ; U6.3 15.41,25.19 15.24,25.02 ; 46.49,5.47 U2.10 46.76,6.42 ; 19.3,19.15 C20.2 ; C20.2 19.91,19.72 ; C20.2 19.3,20.3 ; 27.52,24.42 C24.2 26.94,24.42 ; 34.19,5.47 U1.10 33.91,5.47 ; 15.2,30.69 15.7,31.19 U6.15 ; 15.2,30.69 v1(15.11,30.61) 15.53,30.19 U6.13 ; 27.05,38.96 C11.2 ; C11.2 27.05,40.11 ; C11.2 26.45,39.54 ; C16.2 2.32,22.1 ; C16.2 1.27,22.1 ; C16.2 1.74,21.5 ; 15.97,27.94 U6.9 ; U6.9 15.97,28.19 ; U6.9 17.91,28.19 18.2,27.9 C12.2 ; 52.39,10.06 U9.2 52.58,11.37 ; 37.21,33.4 37,33.61 U7.18 ; 15.64,25.91 v1(15.14,25.91) ; 5.71,37.69 C19.2 5.11,37.69 ; U6.2 15.32,24.69 15.24,24.77 ; U6.2 17.78,24.69 ; U6.2 15.97,24.44 ; U6.63 14.43,23.14 ; U6.63 14.68,23.14 ; U6.13 17.78,30.44 ; U6.13 15.97,30.44 ; 52.35,9.14 R38.2 51.2,9.14 ; v1(45.09,28.32) 45.95,29.19 U7.91 ; 60.32,33.31 J3.35 60.32,35.44 ; 24.64,13.37 U8.4 ; U8.4 24.64,14.67 ; U8.4 24.26,14.02 ; 14.99,28.32 15.36,28.69 U6.10 ; 15.24,24.77 15.24,24.51 ; 15.24,24.77 15.24,25.02 ; 6.38,31.94 U6.33 4.57,31.94 ; 14.22,9.81 C7.1 14.22,8.66 ; 52.05,21.72 C23.2 50.9,21.72 ; U6.15 17.78,30.94 ; U6.15 15.97,30.94 ; 2.2,16.51 TP12.1 1.1,16.51 ; C5.2 2.54,8.19 ; C5.2 1.54,7.52 ; C5.2 3.54,7.52 ; 16.88,23.94 U6.1 15.97,23.94 ; 15.97,28.44 U6.10 ; U6.10 17.78,28.69 ; J3.19 60.18,24.88 60.33,25.02 60.33,25.53 60.58,25.78 60.58,26.8 60.45,26.92 ; 60.37,11.35 J4.7 ; J4.7 62.27,11.35 ; J4.7 61.32,12.31 ; 40.26,38.96 C26.2 40.26,40.11 ; 20.28,35.53 R7.2 20.86,34.92 ; 57.47,15.62 J3.1 58.32,15.62 ; 15.24,25.02 15.14,25.11 v1(15.14,25.91) ; 33.4,38.96 R17.1 33.4,40.11 ; U6.5 17.78,26.19 ; U6.5 15.97,25.94 ; C10.2 25.15,40.28 ; C10.2 25.15,38.92 ; C10.2 24.14,39.6 ; v1(33.78,25.4) 33.16,25.4 32.87,25.69 U7.42 ; R14.1 1.3,30.73 1.27,30.77 ; R14.1 1.74,30.13 ; R14.1 1.74,31.34 ; R14.1 2.32,30.73 ; 19.02,2.5 J1.15 17.04,2.5 ; 6.86,18.83 C17.2 6.26,18.25 ; 49.66,37.85 49.4,37.85 48.9,37.34 ; 37.47,38.96 C32.2 37.47,40.11 ; C12.2 19.05,28.48 ; C12.2 19.05,27.33 ; U6.58 v1(11.93,24.12) 11.23,24.82 10.46,24.82 10.08,24.43 10.08,24.18 9.43,23.52 U6.53 ; 10.96,18.25 R10.2 11.56,18.83 ; 26.54,10.95 C2.2 27.14,10.95 ; 36.83,30.61 36.83,30.48 36.32,29.97 36.32,29.21 37.34,28.19 ; 9.02,31.5 9.02,31.62 9.43,32.03 U6.28 ; 40.51,16.54 C30.2 40.51,15.39 ; 55.88,29.37 C34.2 56.48,29.37 ; U6.17 15.3,33.64 15.6,33.34 v1(15.63,33.34) ; C4.2 12.92,14.26 ; C4.2 12.32,13.69 ; C4.2 12.32,14.84 ; 61.32,0.9 J4.8 ; J4.8 60.37,1.85 ; J4.8 62.27,1.85 ; 13.08,18.83 R11.2 13.08,17.67 ; 52.05,28.91 C29.2 52.05,29.51 ; 18.07,36.66 C9.2 18.67,37.24 ; U7.87 v1(45.09,27.19) ; v1(35.31,22.73) 33.4,22.73 32.95,23.19 U7.47 ; 42,36.62 41.66,36.96 ; 51.12,16.38 C36.2 52.47,16.38 ; 10.54,37.69 C13.2 ; C13.2 10.54,38.84 ; C13.2 9.94,38.27 ; C22.2 52.05,31.32 ; C22.2 52.05,31.92 ; 11.32,7.64 C3.2 ; C3.2 13.32,7.64 ; C3.2 12.32,8.32 ; 27.52,27.34 C31.2 28.1,27.94 ; 46.48,34.67 45.47,33.66 ; 3.96,29.69 4.46,29.19 U6.38 ; 59.2,12.31 J3.34 60.32,14.44 ; 51.2,6.1 R40.2 52.35,6.1 ; 26.42,13.61 R37.2 26.42,14.76
  TOP w0.254: J3.5 59.79,17.88 59.82,17.91 ; 3.94,29.72 3.96,29.69 U6.37 ; U7.18 37,36.41 36.07,37.34 ; U7.58 37,21.04 v1(35.31,22.73) 37.85,22.73 39.5,21.08 U7.63 ; J3.19 v1(55.5,24.88) ; v1(45.09,30.43) 45.84,31.19 U7.95 ; v1(56.64,14.86) 56.64,15.38 57.14,15.88 J3.1 ; J3.26 56.95,28.38 56.53,28.79 C34.2 ; U6.33 5.48,32.24 v2(4.83,32.89) ; v1(59.82,20.83) 59.27,21.38 J3.12 ; U7.8 42,38.65 41.11,39.54 C26.2 ; 43.05,21.97 42.5,21.41 U7.69 ; U7.74 45,21.55 v1(44.58,21.97) ; U6.1 15.56,24.19 15.24,24.51 ; U7.80 45.92,23.69 45.61,24 v1(45.09,24) ; 39.24,39.54 39.24,36.83 39,36.58 U7.14
  TOP w0.305: U1.10 34.61,6.42 v1(35.05,6.86) ; 26.42,10.38 C2.2 28.16,10.38 28.71,10.93 ; 41.29,10.93 v1(40.86,10.5) C1.2 ; U1.19 28.71,10.93 ; U2.19 41.29,10.93 ; U2.10 v1(46.49,9.27)
  TOP w0.508: 3.94,29.72 1.27,29.72 ; R38.2 51.78,9.23 52.58,10.03 U9.2 ; 54.86,32.77 54.91,32.72 54.91,29.29 55.41,28.79 C34.2 ; v1(25.27,28.96) 26.29,27.94 C31.2 ; v2(20.19,27.9) 20.19,26.85 20.74,26.31 C15.2
  TOP w0.559: C9.2 18.76,36.66 19.56,37.47 U5.2
  TOP w0.762: v1(43.13,15.96) C21.2 C30.2 ; 36.07,37.34 v2(36.07,39.12) ; v2(36.07,39.12) 35.65,39.54 C27.2 R17.1 ; v2(36.07,39.12) 36.49,39.54 C32.2 C26.2 ; v1(18.03,16.76) 18.03,19.43 18.33,19.72 C20.2 ; C24.2 v1(26.54,25.02) ; 35.84,25.27 35.72,25.4 v1(33.78,25.4) ; 35.84,25.27 35.84,23.27 v1(35.31,22.73) ; 35.84,25.27 36.86,26.29 v1(40.01,26.29) 40.9,27.19 v1(45.09,27.19) ; v1(27.63,15.06) 27.18,14.61 27.04,14.61 26.62,14.19 R37.2 25.49,14.19 25.32,14.02 U8.4 ; C23.2 51.47,22.62 51.31,22.79 v1(51.31,23.88) ; 11.93,25.91 10.34,25.91 v2(10.03,26.21) ; 11.93,25.91 11.93,30.2 11.52,30.61 ; 11.93,25.91 v1(11.93,24.12) ; 11.93,25.91 v1(15.14,25.91) ; J3.34 60.37,13.38 61.62,14.63 61.62,14.68 61.72,14.78 v1(61.72,16.89) 61.72,32.97 61.62,33.07 61.62,33.12 60.37,34.38 J3.35 58.89,34.38 58.32,33.8 58.32,32.77 54.86,32.77 53.98,33.66 R22.1 ; J3.34 60.32,12.36 J4.7 J4.8 ; J3.34 v1(56.64,13.38) ; 11.43,38.27 v3(11.43,39.62) 11.43,39.75 ; 11.43,38.27 C13.2 ; 11.43,38.27 C18.2 ; 9.02,31.5 9.91,30.61 11.52,30.61 ; 11.56,15.49 8.64,15.49 8.22,15.91 R9.2 7.37,16.64 6.86,17.14 C17.2 ; v1(59.82,16.89) v1(59.82,20.83) ; C9.2 18.67,34.92 ; 11.52,30.61 11.81,30.61 12.35,31.15 v1(12.83,31.15) ; C36.2 v1(51.79,14.99) ; C29.2 v1(52.45,29.21) ; 43.05,21.97 v1(44.58,21.97) ; C2.2 v1(26.54,9.27)
  TOP w1.016: 1.27,32.89 1.27,36.7 2.83,38.27 C19.2 5.71,39.34 6.12,39.75 11.43,39.75 ; 1.27,32.89 v2(4.83,32.89) ; 1.27,32.89 1.27,20.7 2.16,19.81 v2(2.16,17.91) 1.65,17.4 TP12.1 1.65,15.02 1.66,15.01 1.66,14.99 2.52,14.14 C6.2 ; v2(10.79,12.57) 10.79,13.77 11.29,14.26 11.96,14.26 ; 13.87,37.97 13.87,37.29 14.73,36.42 16.28,36.42 17.78,34.92 R7.2 20.28,34.07 20.7,33.66 v2(22.73,33.66) ; 18.92,7.04 18.92,7.87 17.56,9.23 C7.1 13.91,9.23 C3.2 12.32,6.35 11.68,5.71 v2(7.75,5.71) 5.21,5.71 ; 18.92,7.04 U4.2 ; 18.92,7.04 18.92,5.46 18.03,4.57 J1.15 ; 11.96,14.26 11.56,14.67 v2(11.56,16.89) R10.2 R11.2 ; 11.96,14.26 C4.2 ; v2(51.78,4.95) R40.2 R39.2 R38.2 ; C10.2 26.99,39.6 C11.2 28.16,39.54 28.53,39.16 v2(28.53,39.12) ; 5.21,5.71 3.17,5.71 2.54,6.35 C5.2 ; 5.21,5.71 5.19,5.73 U3.1 ; C12.2 v2(20.19,27.9) ; C37.2 v2(55.5,4.95)
  BOTTOM w0.203: 44.58,22.86 44.45,22.73 44.07,22.73 43.78,22.44 R25.1 ; 33.91,21.59 33.91,22.05 34.46,22.61 35.18,22.61 v1(35.31,22.73) ; v3(46.61,17.27) 46.61,16.09 46.48,15.96 ; R31.1 26.54,26.92 ; v1(45.09,27.19) 44.95,27.05 44.32,27.05 43.98,27.39 R27.1 ; 30.35,36.96 30.23,37.08 27.69,37.08 ; 20,14.8 v3(20.7,15.49) ; 42.8,26.8 42.42,26.42
  BOTTOM w0.508: v3(46.35,19.56) 45.97,19.18 45.97,17.91 v3(46.61,17.27)
  BOTTOM w0.762: v1(26.54,25.02) 26.54,27.69 v1(25.27,28.96) 21.25,28.96 v2(20.19,27.9) ; v1(59.82,20.83) 59.05,20.07 49.66,20.07 ; 38.48,15.49 38.48,20.45 36.2,22.73 v1(35.31,22.73) ; 38.48,15.49 36.7,13.72 35.43,13.72 34.8,14.35 34.8,15.88 34.89,15.96 v1(35.83,15.96) ; 38.48,15.49 38.95,15.96 v1(43.13,15.96) 48.35,15.96 49.66,17.27 49.66,20.07 ; 51.31,24.89 v1(51.31,23.88) 51.31,21.72 49.66,20.07 ; 51.31,24.89 51.32,24.88 v1(55.5,24.88) ; 51.31,24.89 51.31,26.29 52.45,27.43 v1(52.45,29.21) 52.45,29.98 52.45,29.99 v1(52.45,31.37) ; v1(61.72,16.89) v1(59.82,16.89) 53.7,16.89 v1(51.79,14.99) 49.51,12.7 ; v1(45.09,30.43) v1(45.09,28.32) v1(45.09,27.19) v1(45.09,24) 45.09,23.37 44.58,22.86 v1(44.58,21.97) ; 49.51,12.7 49.51,10.77 48.01,9.27 v1(46.49,9.27) ; 49.51,12.7 43.05,12.7 v1(40.86,10.5) ; v1(27.52,35.94) 26.54,35.94 25.27,37.21 ; v1(26.54,9.27) 25.4,9.27 24.07,10.6 ; v1(15.63,33.34) 15.7,33.27 15.82,33.27 16.13,32.97 16.13,30.61 ; v1(35.05,6.86) 34.5,7.41 34.5,8.18 v1(27.63,15.06) 24.27,18.41 24.26,18.41 19.56,23.11 17.94,23.11 v1(15.14,25.91) ; v1(12.83,31.15) 14.57,31.15 v1(15.11,30.61) ; v1(13.84,24.13) 13.07,24.13 13.06,24.12 v1(11.93,24.12) ; v2(55.5,4.95) 55.5,8 56.64,9.14 v1(56.64,13.38) v1(56.64,14.86)
  BOTTOM w1.016: v2(10.03,26.21) 6.43,26.21 4.83,27.81 v2(4.83,32.89) ; v2(2.16,17.91) 2.16,8.64 5.08,5.71 v2(7.75,5.71) 10.79,8.76 v2(10.79,12.57) ; v2(22.73,33.66) 22.73,34.68 27.17,39.12 v2(28.53,39.12) v2(36.07,39.12) 39.24,39.12 39.75,38.61 39.75,37.08 38.23,35.56 38.23,32.26 40.01,30.48 v1(40.01,26.29) ; v1(15.11,30.61) 17.49,30.61 v2(20.19,27.9) ; v2(11.56,16.89) 17.91,16.89 v1(18.03,16.76) 24.07,10.73 24.07,10.6 ; v2(51.78,4.95) v2(55.5,4.95)
  vias: v3(1.4,39.62) v3(1.4,38.23) v3(2.79,20.83) v3(3.3,39.62) v3(6.48,4.32) v3(6.48,1.52) v3(13.08,39.62) v3(15.75,36.45) v3(50.16,38.35) v3(54.86,37.47) v3(56.01,39.88) v3(56.77,38.99) v3(57.28,39.88) v3(60.07,9.27) v3(60.07,6.99) v3(60.07,4.83) v3(61.98,35.56)
#CS: length 56.2
  TOP w0.203: U6.43 8.78,26.69 v1(9.4,27.3) ; J1.4 43.89,4.58 U2.6
  BOTTOM w0.203: J1.4 41.99,6.48 37.85,6.48 16.51,27.81 9.91,27.81 v1(9.4,27.3)
#FCS: length 8.5
  TOP w0.203: U7.70 43,18.73 44.32,17.4 44.32,14.18 44.54,13.97 U2.14
#FRD: length 8.7
  TOP w0.203: U7.72 44,18.93 45.34,17.59 45.34,14.61 45.84,14.11 U2.12
#FWAIT: length 18
  TOP w0.203: v1(34.67,21.84) 34,21.17 U7.52 ; v1(35.94,14.73) 31.62,14.73 30.01,13.12 30.01,12.12 U1.17
  BOTTOM w0.203: v1(35.94,14.73) 36.7,15.49 36.7,19.81 v1(34.67,21.84)
#FWR: length 8.6
  TOP w0.203: U2.13 45.19,14 44.83,14.35 44.83,17.53 43.5,18.86 U7.71
#FXRES: length 8.7
  TOP w0.203: U7.73 44.5,19.01 45.85,17.66 45.85,14.86 46.49,14.22 U2.11
#RD: length 65.3
  TOP w0.203: U2.8 45.19,4.98 45.85,4.32 47.5,4.32 48.01,3.81 49.74,3.81 J1.2 ; v1(7.62,28) 7.12,28 6.81,27.69 U6.41
  BOTTOM w0.203: J1.2 46.06,7.49 38.1,7.49 16.76,28.83 8.44,28.83 v1(7.62,28)
#SPI_CS: length 40.3
  TOP w0.203: v1(24.77,32.05) 24.77,31.56 24.59,31.38 24.59,28.24 v1(25.4,27.43) ; U8.1 20.43,14.02 20.26,14.19 R35.2 18.71,14.19 18.29,14.61 18.29,15.49 17.3,16.48 17.3,19.96 18.16,20.83 18.16,21.97 19.68,23.5 TP8.1 21.84,24.64 21.86,24.65 21.86,24.66 v1(22.21,25.01) ; U7.27 33.71,33.19 v1(34.29,32.61)
  BOTTOM w0.203: v1(24.77,32.05) 25.32,32.61 v1(34.29,32.61) ; v1(25.4,27.43) 25.05,27.78 25.05,27.83 24.69,28.19 23.52,28.19 22.21,26.88 v1(22.21,25.01)
#SPI_WP: length 5.9
  TOP w0.203: U8.3 23.37,14.86 23.75,15.24 25.24,15.24 25.79,15.79 R37.1 26.42,16.39 26.16,16.64 TP9.1
#WAIT: length 45.1
  TOP w0.203: U1.3 29.36,7.49 28.88,7.97 v1(28.82,7.97) ; v1(10.92,24.13) 10.57,23.78 10.29,23.78 9.93,23.42 U6.54 9.93,21.16 9.44,20.68 8.61,20.68 8.38,20.45 R1.2
  BOTTOM w0.203: v1(28.82,7.97) 28.82,8.51 18.66,18.67 8.64,18.67 5.84,21.46 5.84,23.75 7.37,25.27 9.78,25.27 v1(10.92,24.13)
#WR: length 60.7
  TOP w0.203: U6.42 7.89,27.19 v1(8.64,27.94) ; J1.3 47.2,3.81 45.59,3.81 44.54,4.87 U2.7
  BOTTOM w0.203: v1(8.64,27.94) 9.02,28.32 16.64,28.32 37.97,6.99 44.03,6.99 J1.3
#XRES: length 69.7
  TOP w0.203: v1(7.62,29.46) 6.89,30.19 U6.36 ; U2.9 45.84,5.09 46.1,4.83 47.88,4.83 48.26,4.45 50.04,4.45 50.67,3.81 52.28,3.81 J1.1
  BOTTOM w0.203: J1.1 52.28,3.81 50.8,3.81 49.66,4.95 49.53,4.95 46.48,8 38.23,8 16.89,29.34 8.24,29.34 8.12,29.46 v1(7.62,29.46)
A0: length 51.7
  TOP w0.203: U2.5 43.24,3.7 43.43,3.5 J1.5 ; v1(13.34,26.92) 13.34,30.23 13.41,30.3 13.41,30.31 14.79,31.69 U6.16
  BOTTOM w0.203: v1(13.34,26.92) 16.73,26.92 37.68,5.97 39.96,5.97 J1.5
B0: length 29.7
  TOP w0.203: U7.9 41.5,34.41 42.04,33.87 42.04,33.02 v1(41.66,32.64) ; J3.20 59.5,25.38 59.79,25.67 v1(59.79,26.16)
  BOTTOM w0.203: v1(41.66,32.64) 42.09,33.07 42.09,33.91 42.74,34.57 54.08,34.57 55.65,32.99 55.65,30.84 59.79,26.69 v1(59.79,26.16)
B1: length 30.3
  TOP w0.203: U7.19 36.5,32.84 38.73,30.61 v1(41.53,30.61) ; v1(56.52,25.65) 57.09,25.65 57.31,25.88 J3.21
  BOTTOM w0.203: v1(56.52,25.65) 56.52,26.16 53.21,29.46 53.21,31.75 52.83,32.13 45.72,32.13 44.65,31.06 41.99,31.06 v1(41.53,30.61)
B2: length 13.7
  TOP w0.203: U7.93 52.75,30.19 53.14,29.79 53.14,28.14 54.9,26.38 J3.22
B3: length 13.8
  TOP w0.203: U7.94 53.01,30.69 53.54,30.15 53.54,28.37 55.04,26.88 J3.23
B4: length 14.8
  TOP w0.203: U7.98 48.12,32.69 48.38,32.43 52.54,32.43 53.95,31.01 53.95,28.6 55.17,27.38 J3.24
B5: length 17
  TOP w0.203: U7.99 48.55,33.19 49.02,33.66 R22.2 ; R22.2 R21.1 ; R22.2 49.87,33.03 50.07,32.83 52.76,32.83 54.36,31.24 54.36,28.83 55.31,27.88 J3.25
CLK: length 29.7
  TOP w0.203: U6.39 9.28,28.69 v1(10.92,27.05) ; R5.2 23.34,11.98 22.64,12.67 18.57,12.67 16.89,14.35 16.89,20.71 17.27,21.09 v1(17.27,21.59)
  BOTTOM w0.203: v1(10.92,27.05) 11.94,27.05 16.92,22.07 16.92,21.94 v1(17.27,21.59)
COLOR_S0: length 8
  TOP w0.203: v1(43.31,26.11) 44.79,26.11 46.22,24.69 U7.82
  BOTTOM w0.203: R24.1 R25.2 v1(43.31,26.11)
COLOR_S1: length 8.1
  TOP w0.203: U7.97 44.5,32.19 v1(42.67,30.35)
  BOTTOM w0.203: R27.2 42.67,28.99 ; 42.67,28.99 R26.1 ; 42.67,28.99 v1(42.67,30.35)
COLOR_S2: length 17.4
  TOP w0.203: U7.20 36,34.41 35.86,34.28 35.86,28.73 36.37,28.22 36.37,28.2 36.58,28 36.58,27.43 35.69,26.54 v1(34.67,26.54)
  BOTTOM w0.203: v1(34.67,26.54) 33.99,27.23 32.44,27.23 32.13,26.92 R31.2 R30.1
D0: length 47.9
  TOP w0.203: J1.6 40.89,3.5 40.89,3.51 40.89,3.56 42.59,5.25 U2.4 ; v1(9.4,24.51) 8.93,24.04 U6.52
  BOTTOM w0.203: v1(9.4,24.51) 13.21,20.7 18.92,20.7 31.37,8.26 31.37,7.87 33.91,5.33 38.06,5.33 J1.6
D1: length 48.8
  TOP w0.203: v1(8.28,24.51) 8.28,23.62 8.43,23.47 U6.51 ; J1.7 38.35,3.5 39.42,4.57 41.15,4.57 41.94,5.36 U2.3
  BOTTOM w0.203: J1.7 38.35,3.5 36.93,4.93 33.68,4.93 30.96,7.65 30.96,8.09 18.86,20.19 13.08,20.19 9.65,23.62 9.17,23.62 v1(8.28,24.51)
D2: length 48
  TOP w0.203: U2.2 41.29,5.44 40.92,5.08 38.39,5.08 J1.8 ; U6.50 7.93,23.32 v1(7.37,23.88)
  BOTTOM w0.203: J1.8 35.81,3.91 35.28,4.45 33.53,4.45 31.92,6.06 30.48,7.49 30.48,7.99 18.79,19.68 12.95,19.68 9.53,23.11 8.13,23.11 v1(7.37,23.88)
D3: length 40.8
  TOP w0.203: U1.9 33.26,4.57 33.27,4.56 J1.9 ; U6.49 v1(6.6,22.24)
  BOTTOM w0.203: v1(6.6,22.24) 9.76,22.24 12.83,19.18 18.72,19.18 29.97,7.93 29.97,7.37 33.27,4.07 J1.9
D4: length 42.7
  TOP w0.203: U6.47 4.5,24.69 4.32,24.51 v1(4.32,23.11) ; U1.8 32.61,4.38 J1.10
  BOTTOM w0.203: v1(4.32,23.11) 4.32,22.35 12.32,14.35 16.76,14.35 25.5,5.61 26.54,4.57 28.66,4.57 J1.10
D5: length 43.6
  TOP w0.203: U6.46 4.11,25.19 3.56,24.64 v1(3.56,23.75) ; U1.7 31.96,4.66 31.11,3.81 29.97,3.81 29.37,3.21 28.9,3.21 J1.11
  BOTTOM w0.203: v1(3.56,23.75) 3.56,22.48 12.19,13.84 16.64,13.84 26.67,3.81 26.88,3.81 J1.11
D6: length 45.5
  TOP w0.203: U6.45 3.56,25.69 2.87,25 v1(2.87,24.5) ; J1.12 26.83,3.68 27.68,3.68 27.7,3.69 29.09,3.69 29.62,4.22 30.51,4.22 31.31,5.02 U1.6
  BOTTOM w0.203: v1(2.87,24.5) 2.87,22.53 11.94,13.46 12,13.46 12.13,13.34 16.51,13.34 25.65,4.19 J1.12
D7: length 48.7
  TOP w0.203: U6.44 3.08,26.19 v1(2.67,25.78) ; U1.5 30.66,5.26 30.02,4.62 29.39,4.62 28.96,4.19 26.04,4.19 25.54,3.69 24.3,3.69 J1.13
  BOTTOM w0.203: v1(2.67,25.78) 2.16,25.27 2.16,22.61 11.81,12.95 11.87,12.95 12,12.83 16.38,12.83 24.38,4.83 24.38,3.77 J1.13
DCLK: length 16.6
  TOP w0.203: U7.77 46.06,22.19 45.85,21.97 45.85,21.34 49.4,17.78 54.23,17.78 55.63,16.38 J3.2
DONE: length 3.8
  TOP w0.203: U7.54 35,18.87 34.52,18.39 33.5,18.39 33.27,18.17 D1.2
ENABLE: length 30.5
  TOP w0.203: J3.27 v1(60.07,28.88) ; U7.13 v1(39.5,32.89)
  BOTTOM w0.203: v1(39.5,32.89) 39.5,34.04 41.27,35.81 54.74,35.81 57.53,33.02 57.53,31.42 v1(60.07,28.88)
FA0: length 8.7
  TOP w0.203: U2.15 43.89,17.17 42,19.06 U7.68
FCLK: length 11.9
  TOP w0.203: U7.44 33.1,24.69 33.4,24.38 v1(34.67,24.38) ; R2.2 29.97,18.24 30,18.27 30,18.32 30.35,18.67 v1(30.61,18.67)
  BOTTOM w0.203: v1(30.61,18.67) 30.61,19.34 34.67,23.4 v1(34.67,24.38)
FD0: length 11.2
  TOP w0.203: U2.16 43.24,13.66 42.29,14.61 39.88,14.61 39.57,14.91 39.57,18.04 40.5,18.97 U7.65
FD1: length 10.9
  TOP w0.203: U7.64 40,19.04 39.17,18.21 39.17,14.55 39.62,14.1 41.78,14.1 42.59,13.29 U2.17
FD2: length 10.6
  TOP w0.203: U2.18 41.94,13.23 41.58,13.59 39.37,13.59 38.76,14.2 38.76,18.41 39,18.65 U7.62
FD3: length 10.7
  TOP w0.203: U1.11 36.12,12.12 37.5,13.49 U7.59
FD4: length 11.7
  TOP w0.203: U7.57 36.5,18.87 37.08,18.29 37.08,13.72 36.83,13.46 33.53,13.46 33.26,13.2 U1.12
FD5: length 11.6
  TOP w0.203: U1.13 32.61,13.31 33.27,13.97 36.32,13.97 36.68,14.33 36.68,18.03 36,18.71 U7.56
FD6: length 14.8
  TOP w0.203: U1.14 31.96,11.09 32.13,10.92 35.56,10.92 37.95,13.31 37.95,18.92 38,18.97 U7.60
FD7: length 16.5
  TOP w0.203: U7.61 38.5,18.81 38.35,18.67 38.35,13.08 35.71,10.44 31.85,10.44 31.31,10.98 U1.15
FPDAT0: length 25.6
  TOP w0.203: U6.21 12.93,35.02 13.51,35.61 15.7,35.61 17.37,33.93 18.84,33.93 22.73,30.04 22.73,27.94 23.95,26.72 30.02,26.72 30.49,27.19 U7.39
FPDAT1: length 24.7
  TOP w0.203: U6.20 13.43,34.79 13.82,35.18 13.9,35.18 13.93,35.2 15.41,35.2 17.14,33.48 18.72,33.48 22.3,29.9 22.3,27.74 23.72,26.31 30.23,26.31 30.35,26.19 U7.41
FPDAT2: length 24.2
  TOP w0.203: U7.43 30.57,25.19 29.84,25.91 23.5,25.91 21.89,27.51 21.89,29.67 18.49,33.07 16.97,33.07 15.24,34.8 14.1,34.8 13.93,34.63 U6.19
FPDAT3: length 24
  TOP w0.203: U7.49 30.52,22.19 30.23,22.48 26.29,22.48 21.49,27.28 21.49,29.38 18.2,32.66 15.87,32.66 15.71,32.5 14.64,32.5 14.43,32.71 U6.18
FPFRAME: length 38.4
  TOP w0.203: U7.35 34.44,29.19 v1(35.69,27.94) ; v1(7.87,31.88) 8.43,32.43 U6.30
  BOTTOM w0.203: v1(7.87,31.88) 8.51,31.88 11.63,35 17.01,35 21.48,30.53 33.1,30.53 v1(35.69,27.94)
FPLINE: length 33.9
  TOP w0.203: U6.26 10.43,32.64 10.16,32.37 v1(10.16,31.88) ; v1(34.67,27.94) 33.93,28.69 U7.36
  BOTTOM w0.203: v1(34.67,27.94) 32.49,30.12 21.31,30.12 16.84,34.59 11.99,34.59 10.16,32.77 v1(10.16,31.88)
FPSHIFT: length 26.8
  TOP w0.203: U6.23 11.93,32.65 12.48,32.1 15.88,32.1 16.04,32.26 18.03,32.26 21.08,29.21 21.08,27.11 26.12,22.07 30,22.07 30.39,21.69 U7.50
G0: length 27.6
  TOP w0.203: U7.4 44,34.16 44.25,33.91 v1(44.25,32.97) ; J3.13 v1(56.57,21.88)
  BOTTOM w0.203: v1(44.25,32.97) 44.63,33.35 53.39,33.35 54.43,32.31 54.43,30.15 58.09,26.49 58.09,23.4 v1(56.57,21.88)
G1: length 30.3
  TOP w0.203: v1(42.8,32.64) 43.5,33.34 U7.5 ; J3.14 59.39,22.38 v1(59.79,21.97)
  BOTTOM w0.203: v1(42.8,32.64) 43.92,33.76 53.62,33.76 54.84,32.54 54.84,30.38 58.5,26.72 58.5,23.27 v1(59.79,21.97)
G2: length 32.8
  TOP w0.203: J3.15 v1(56.57,22.88) ; U7.15 38.5,32.5 39.12,31.88 40.01,31.88 v1(40.51,32.38)
  BOTTOM w0.203: v1(40.51,32.38) 40.89,32.38 41.4,31.88 44.26,31.88 45.32,32.94 53.17,32.94 54.03,32.09 54.03,29.92 57.68,26.26 57.68,23.99 v1(56.57,22.88)
G3: length 28.4
  TOP w0.203: v1(42.8,33.66) 43,33.85 U7.6 ; J3.16 59.43,23.38 v1(59.82,22.99)
  BOTTOM w0.203: v1(59.82,22.99) 58.93,23.88 58.93,26.92 55.24,30.61 55.24,32.77 53.85,34.16 43.31,34.16 v1(42.8,33.66)
G4: length 31.4
  TOP w0.203: U7.16 38,32.36 38.99,31.37 v1(40.77,31.37) ; J3.17 v1(56.52,23.88)
  BOTTOM w0.203: v1(56.52,23.88) 57.28,24.64 57.28,26.04 53.62,29.69 53.62,31.92 53,32.54 45.55,32.54 44.48,31.47 41.36,31.47 41.26,31.37 v1(40.77,31.37)
G5: length 31.1
  TOP w0.203: J3.18 59.44,24.38 v1(59.82,24) ; U7.10 41,34.06 41.27,33.78 v1(41.27,33.66)
  BOTTOM w0.203: v1(41.27,33.66) 41.63,34.01 41.63,34.23 42.37,34.98 54.31,34.98 56.06,33.22 56.06,31 60.58,26.48 60.58,24.77 v1(59.82,24)
HSYNC: length 14
  TOP w0.203: J3.3 56.02,16.88 52.07,20.83 49.28,20.83 48.39,21.72 48.39,22.42 48.12,22.69 U7.78
LEDA: length 90.7
  TOP w0.203: U9.5 52.58,12.45 52.96,12.06 54.74,12.06 55.5,11.3 v2(55.5,10.54)
  TOP w0.508: J4.3 J4.2
  TOP w0.762: R41.2 v2(12.83,4.83) ; C37.1 56.81,9.12 56.82,9.1 J4.1 J4.2 ; v2(58.04,10.54) v2(55.5,10.54)
  TOP w1.016: D2.2 v2(50.04,5.95) ; C37.1 v2(55.5,10.54)
  BOTTOM w0.635: v2(58.04,10.54) 58.04,2.16 56.77,0.89 9.14,0.89 8,2.03 8,3.81 9.02,4.83 v2(12.83,4.83)
  BOTTOM w1.016: v2(50.04,5.95) 50.04,7.37 53.21,10.54 v2(55.5,10.54)
LEDK: length 65.3
  TOP w0.203: J4.6 58.07,4.35
  TOP w0.508: J4.4 J4.5 ; U9.3 53.53,9.29 R38.1
  TOP w0.635: J4.6 57.4,3.44 57.4,1.52 56.77,0.89 9.13,0.89 8.03,1.99 R42.2
  TOP w0.762: 58.07,4.35 J4.5 ; 57.4,3.44 57.29,3.56 54.99,3.56 53.38,5.17 R40.1
  TOP w1.016: R40.1 R39.1 R38.1
M0: length 4.7
  TOP w0.203: U7.25 32.08,35.36 30.35,37.08 R15.2
M1: length 3.1
  TOP w0.203: U7.23 34.5,36.44 33.95,36.98 33.75,36.98 33.4,37.33 R17.2
M2: length 4.3
  TOP w0.203: R16.2 31.88,36.96 32.26,36.58 33.78,36.58 34,36.36 U7.24
MOD: length 31.4
  TOP w0.203: U7.33 33.74,30.19 34.29,30.73 v1(34.29,31.37) ; U6.27 v1(9.93,35.31)
  BOTTOM w0.203: v1(9.93,35.31) 10.43,35.81 17.53,35.81 21.97,31.37 v1(34.29,31.37)
PROG_B: length 7.6
  TOP w0.203: U7.100 48.29,33.69 48.51,33.91 48.51,36.07 49.15,36.7 R28.2 49.87,36.73 50.44,37.29 50.44,37.48 TP10.1
R0: length 16.6
  TOP w0.203: J3.6 55.79,18.38 53.82,20.35 53.82,22.12 52.55,23.39 52.55,24.92 51.18,26.29 48.9,26.29 48.29,25.69 U7.84
R1: length 16.5
  TOP w0.203: U7.85 48.2,26.19 48.71,26.7 51.41,26.7 52.96,25.15 52.96,23.62 54.23,22.35 54.23,20.57 55.93,18.88 J3.7
R2: length 16.4
  TOP w0.203: J3.8 56.06,19.38 54.66,20.78 54.66,22.56 53.39,23.83 53.39,25.29 51.58,27.1 48.54,27.1 48.12,26.69 U7.86
R3: length 16.2
  TOP w0.203: U7.88 48.26,27.69 48.44,27.51 51.75,27.51 53.8,25.46 53.8,24.05 55.07,22.78 55.07,21.01 56.2,19.88 J3.9
R4: length 16.2
  TOP w0.203: J3.10 56.33,20.38 55.47,21.23 55.47,22.95 54.23,24.2 54.23,25.65 51.97,27.91 48.69,27.91 48.42,28.19 U7.89
R5: length 16.2
  TOP w0.203: U7.90 48.5,28.69 48.86,28.32 52.14,28.32 54.64,25.82 54.64,24.49 55.88,23.24 55.88,21.46 56.47,20.88 J3.11
RL: length 24
  TOP w0.203: U7.12 40,33.87 v1(40.21,33.66) ; J3.30 57.31,30.38 56.74,30.95 v1(56.74,31.62)
  BOTTOM w0.203: v1(56.74,31.62) 56.74,33.17 54.53,35.38 41.94,35.38 v1(40.21,33.66)
SLP: length 22.2
  TOP w0.203: v1(23.62,4.19) 25.15,4.19 25.65,4.7 28.83,4.7 29.24,5.11 29.67,5.11 30.01,5.44 30.01,6.42 U1.4
  BOTTOM w0.203: v1(23.62,4.19) 23.11,4.7 14.73,4.7 13.84,3.81 11.72,3.81 J1.18
SPI_CLK: length 15.7
  TOP w0.203: U8.6 23.37,21.46 TP5.1 24.77,21.97 25.53,21.21 29.46,21.21 30,20.68 31.96,20.68 32.64,20 32.64,19.14 32.98,18.8 34.29,18.8 34.5,19 U7.53
SPI_MISO: length 21.8
  TOP w0.203: U8.2 22.1,15.88 23.37,17.14 23.37,18.54 22.79,19.12 22.79,22.28 23.37,22.86 ; 23.37,22.86 TP7.1 ; 23.37,22.86 24.64,22.86 25.88,21.62 29.76,21.62 30.29,21.08 32.13,21.08 33.2,20.01 U7.51
SPI_MOSI: length 13.2
  TOP w0.203: v1(33.78,23.5) 33.29,23.5 33.1,23.69 U7.46 ; U8.5 25.45,20.02 TP6.1 28.07,19.3 v1(29.21,20.45)
  BOTTOM w0.203: v1(33.78,23.5) 32.26,23.5 v1(29.21,20.45)
STANDBY: length 43
  TOP w0.203: v1(28.15,20.49) 25.61,20.49 25.02,21.08 24.26,21.08 23.95,20.77 23.95,16.96 22.73,15.75 22.73,13.21 22.61,13.08 18.92,13.08 17.58,14.43 v1(17.58,15.11) ; v1(13.97,12.06) v1(13.97,15.11) ; U4.1 v1(14.48,7.04) ; v1(33.66,26.54) 33.16,26.54 33.02,26.69 U7.40
  BOTTOM w0.203: v1(13.97,15.11) v1(17.58,15.11) ; v1(14.48,7.04) 14.48,9.14 13.97,9.65 v1(13.97,12.06) ; v1(33.66,26.54) 28.15,21.04 v1(28.15,20.49)
TCK: length 5.1
  TOP w0.203: U7.76 47.17,21.41 48.64,19.94 R33.2 49.87,19.28 50.04,19.11 TP2.1
TDI: length 4.3
  TOP w0.203: U7.2 45,36.74 45.34,37.08 R32.2 44.62,37.81 TP4.1
TDO: length 2.9
  TOP w0.203: U7.75 45.5,19.02 45.97,18.54 TP1.1
TMS: length 6.2
  TOP w0.203: U7.1 45.5,36.48 45.72,36.7 46.61,36.7 46.86,36.96 R34.2 47.59,37.81 48.26,38.48 TP3.1 49.28,38.48
UD: length 23.3
  TOP w0.203: v1(60.07,31.11) 59.83,30.88 J3.31 ; v1(43.94,37.08) 44.5,36.53 U7.3
  BOTTOM w0.203: v1(43.94,37.08) 44.81,36.22 54.91,36.22 57.94,33.19 57.94,31.6 58.42,31.11 v1(60.07,31.11)
VS0: length 3
  TOP w0.203: U7.31 30.8,31.19 29.97,30.35 R19.1
VS1: length 2.8
  TOP w0.203: R20.1 29.72,31.88 29.91,31.69 U7.30
VS2: length 3.5
  TOP w0.203: R18.1 29.72,33.4 30.23,32.9 30.23,32.38 30.43,32.19 U7.29
VSYNC: length 16.9
  TOP w0.203: U7.83 48.43,25.19 49.12,25.88 50.95,25.88 52.07,24.77 52.07,23.24 53.42,21.89 53.42,20.12 56.16,17.38 J3.4
XECL: length 30.3
  TOP w0.203: v1(33.66,27.94) 33.41,28.19 U7.37 ; U6.24 v1(11.43,31.88)
  BOTTOM w0.203: v1(11.43,31.88) 11.43,33.27 12.32,34.16 16.64,34.16 21.08,29.72 31.88,29.72 v1(33.66,27.94)
YDIS: length 86.9
  TOP w0.203: U9.4 53.53,14.09 53.59,14.16 ; 53.59,14.16 58.35,14.16 61.04,16.84 61.04,31.29 v1(60.07,32.26) ; 53.59,14.16 R43.2 ; 42.5,37.59 U7.7 ; 42.5,37.59 42.5,39.42 v1(41.91,40.01) ; 42.5,37.59 v1(42.93,37.59) ; v1(8.51,38.27) R45.2
  BOTTOM w0.203: v1(42.93,37.59) 43.28,37.94 44.48,37.94 45.8,36.63 55.07,36.63 58.34,33.36 58.34,33.35 59.44,32.26 v1(60.07,32.26) ; v1(41.91,40.01) 41.41,40.01 41.03,40.39 10.63,40.39 v1(8.51,38.27)
YSCL: length 34.5
  TOP w0.203: v1(35.18,29.46) 34.96,29.69 U7.34 ; U6.29 v1(8.93,35.31)
  BOTTOM w0.203: v1(8.93,35.31) 9.69,34.54 10.41,34.54 11.28,35.41 17.3,35.41 21.77,30.94 33.71,30.94 v1(35.18,29.46)
N1268731: length 3.3
  TOP w0.203: R45.1 7.24,35.31 7.93,34.62 U6.31
N1269622: length 3.4
  TOP w0.203: U6.61 13.43,21.24 13.72,20.95 14.36,20.95 14.86,20.45 R13.2
N1269731: length 2.2
  TOP w0.254: R14.2 3.97,30.73 4.01,30.69 U6.35
N1279949: length 3.4
  TOP w0.559: U5.4 22.94,34.97 22.99,34.92 ; 22.99,34.92 R6.2 ; 22.99,34.92 R7.1
N1292260: length 2.3
  TOP w0.381: J1.16 15.49,3.59 15.53,3.63 R41.1
N1295201: length 4.7
  TOP w0.203: U4.3 22.2,10.38 R5.1 23.39,10.38 24.3,11.29 24.3,11.41 24.87,11.98 R4.1
N1295205: length 8.9
  TOP w0.203: R4.2 24.89,7.24 26.92,5.21 28.48,5.21 28.71,5.44 U1.2
N1302115: length 6.9
  TOP w0.203: U6.59 12.43,21.31 13.08,20.66 R11.1 13.71,19.85 13.97,19.59 13.97,17.46 13.17,16.66 R12.1
N1302518: length 2.4
  TOP w0.203: R10.1 11.56,20.45 11.43,20.58 U6.57
N1302632: length 6.1
  TOP w0.203: U6.56 10.93,20.83 10.71,20.62 10.71,19.05 R8.1 9.91,17.35 9.82,17.26 R9.1
N1385205: length 3
  TOP w0.203: U7.48 30.65,22.69 29.97,23.37 R23.1
N1393291: length 1.7
  TOP w0.508: D1.1 R29.2
N1408610: length 2.4
  TOP w0.203: R36.2 21.6,21.59 22.1,21.09 U8.7
N1457773: length 4.7
  TOP w0.559: L1.2 50.09,11.38 50.75,10.71 U9.1
  TOP w0.635: D2.1 48.77,10.87 L1.2
N1465328: length 6
  TOP w0.381: J1.17 11.17,4.28 9.4,4.28 8.72,3.59 R42.1
N1502699: length 4.1
  TOP w0.203: R2.1 29.97,14.35 29.36,13.74 U1.18
N1509290: length 33.3
  TOP w0.203: v1(36.96,10.41) 36.58,10.03 31.5,10.03 30.66,10.87 U1.16 ; v1(55.12,14.86) 55.12,15.91 54.22,16.8 R43.1
  BOTTOM w0.203: v1(55.12,14.86) 55.12,13.59 52.88,11.35 52.88,11.35 50.03,8.51 38.86,8.51 v1(36.96,10.41)

## Copper pours and planes (outline as drawn; the poured copper is in the pictures)
GND on TOP: 0.5,0.5 0.5,40.5 62.5,40.5 62.5,0.5 ; 21 cut-outs
GND on BOTTOM: 0.5,0.5 0.5,40.5 62.5,40.5 62.5,0.5 ; 18 cut-outs

## Text on the board
Ref Des/Silkscreen Bottom: GND | SCLK | VCOM | SDATA | PROG_XRES | SCL2_SCLK | SDA2_MOSI | INT | VAUX | +3V3 | RX_DBG | RX_HOST | TX_HOST | SCL_nSS | SDA_MISO | mxnTouch True Touch Bridge
User.Comments: PROJECT: | P/N: | DATE: | REV: | Layer | HJH | MXNTTB-TTDVT-2012004 | 2012/02/23 | True Touch Bridge | 01 | 16.3 | mxnTouch
User.41: BOTTOM | 2
User.42: LAYER2 | 2
User.43: LAYER3 | 3
User.44: LAYER4 | 4
User.45: PAST-TOP | SILK-BOT | PAST-BOT | SILK-TOP | MASK-BOT | MASK-TOP | TOP | 1 | Layer5 | OUTLINE | DRILL_DRAWING | 5 | FIGURE | SIZE | 10.0 | 15.0 | 19.689 | 40.0 | 118.11 | DRILL CHART: TOP to BOTTOM | ALL UNITS ARE IN MILS | TOLERANCE | +3.0/-3.0 | +0.0/-0.0 | PLATED | QTY | 22 | 136 | 25 | 18 | 2
